# Altium PCB PCBanahtarlama.PcbDoc
Units mil, origin at the board's own origin, x right, y up, seen from the top; angles counter-clockwise.
Board outline 2550 x 1850 mil, 2 copper layers (Top Layer, Bottom Layer); 7 components, 4 nets, 19 pads, 0 vias.
Unrouted connection lines stored in the file: 3.
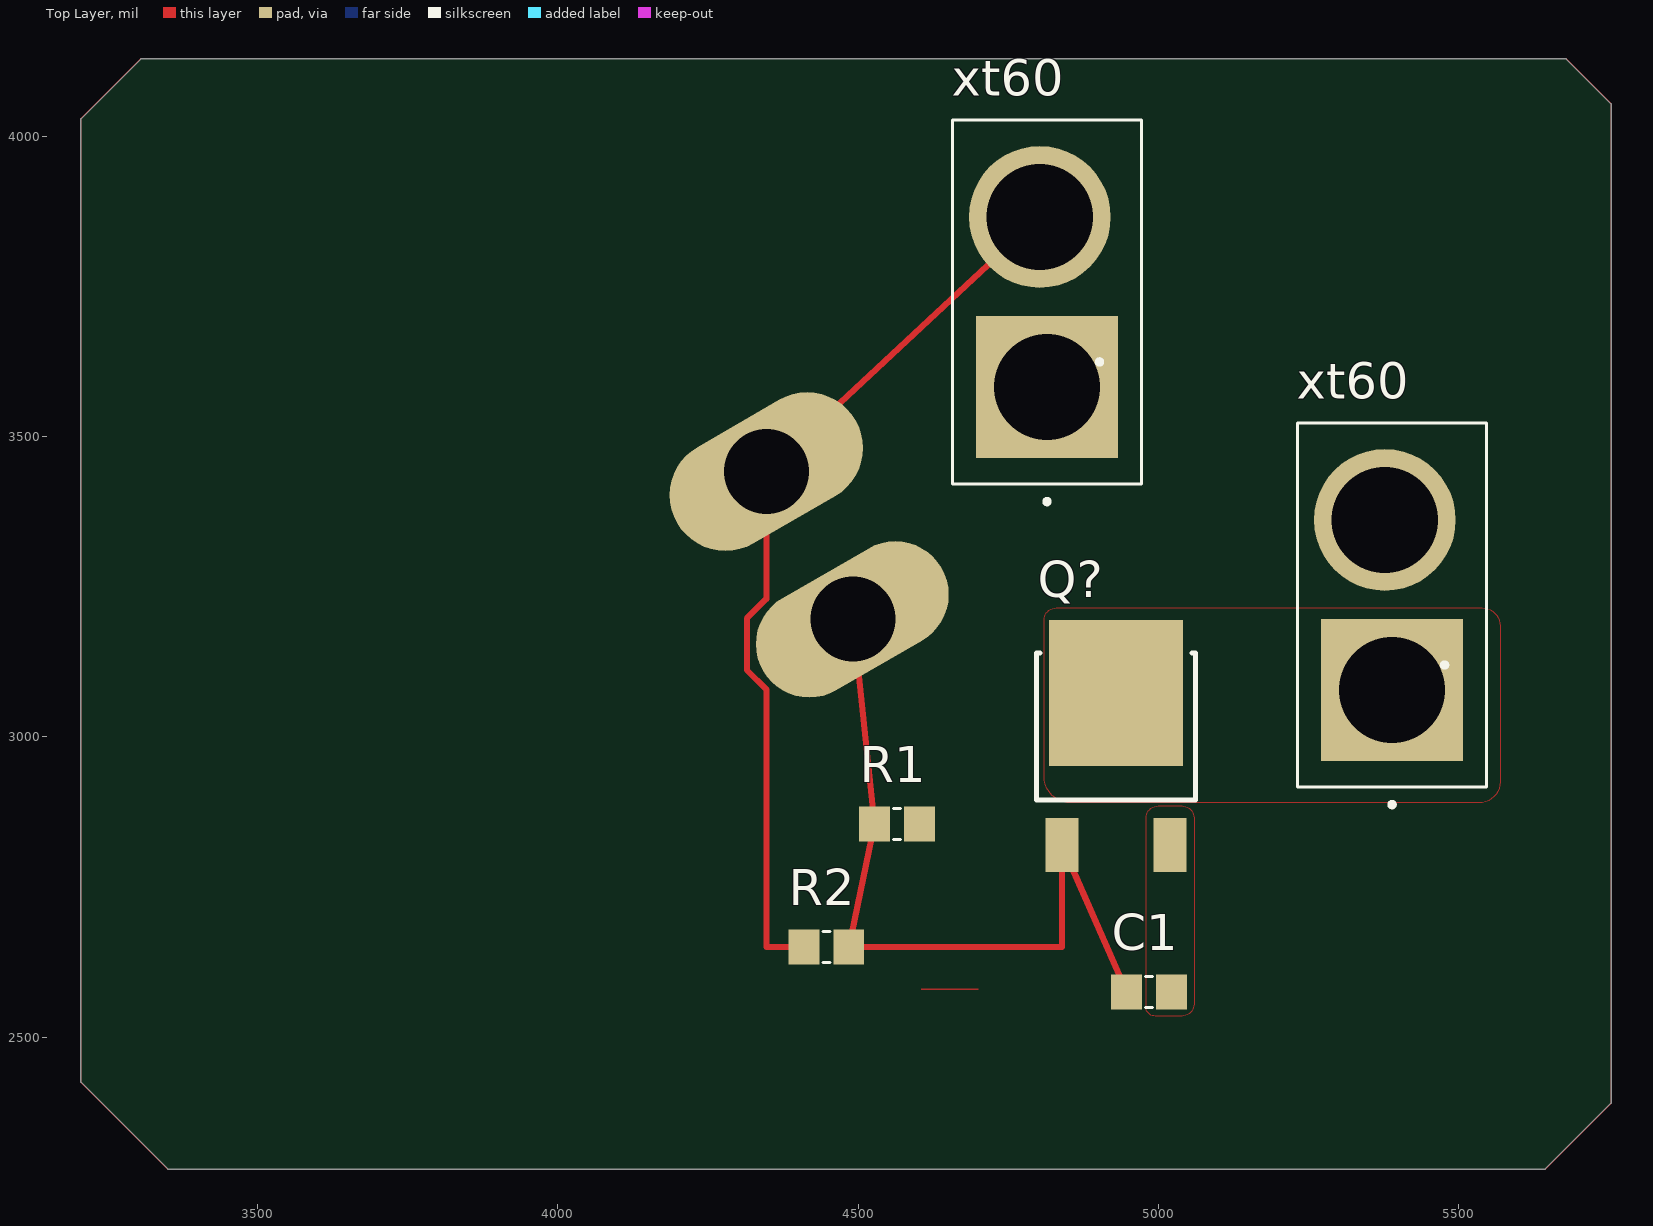
[diagram p0: Top Layer view]
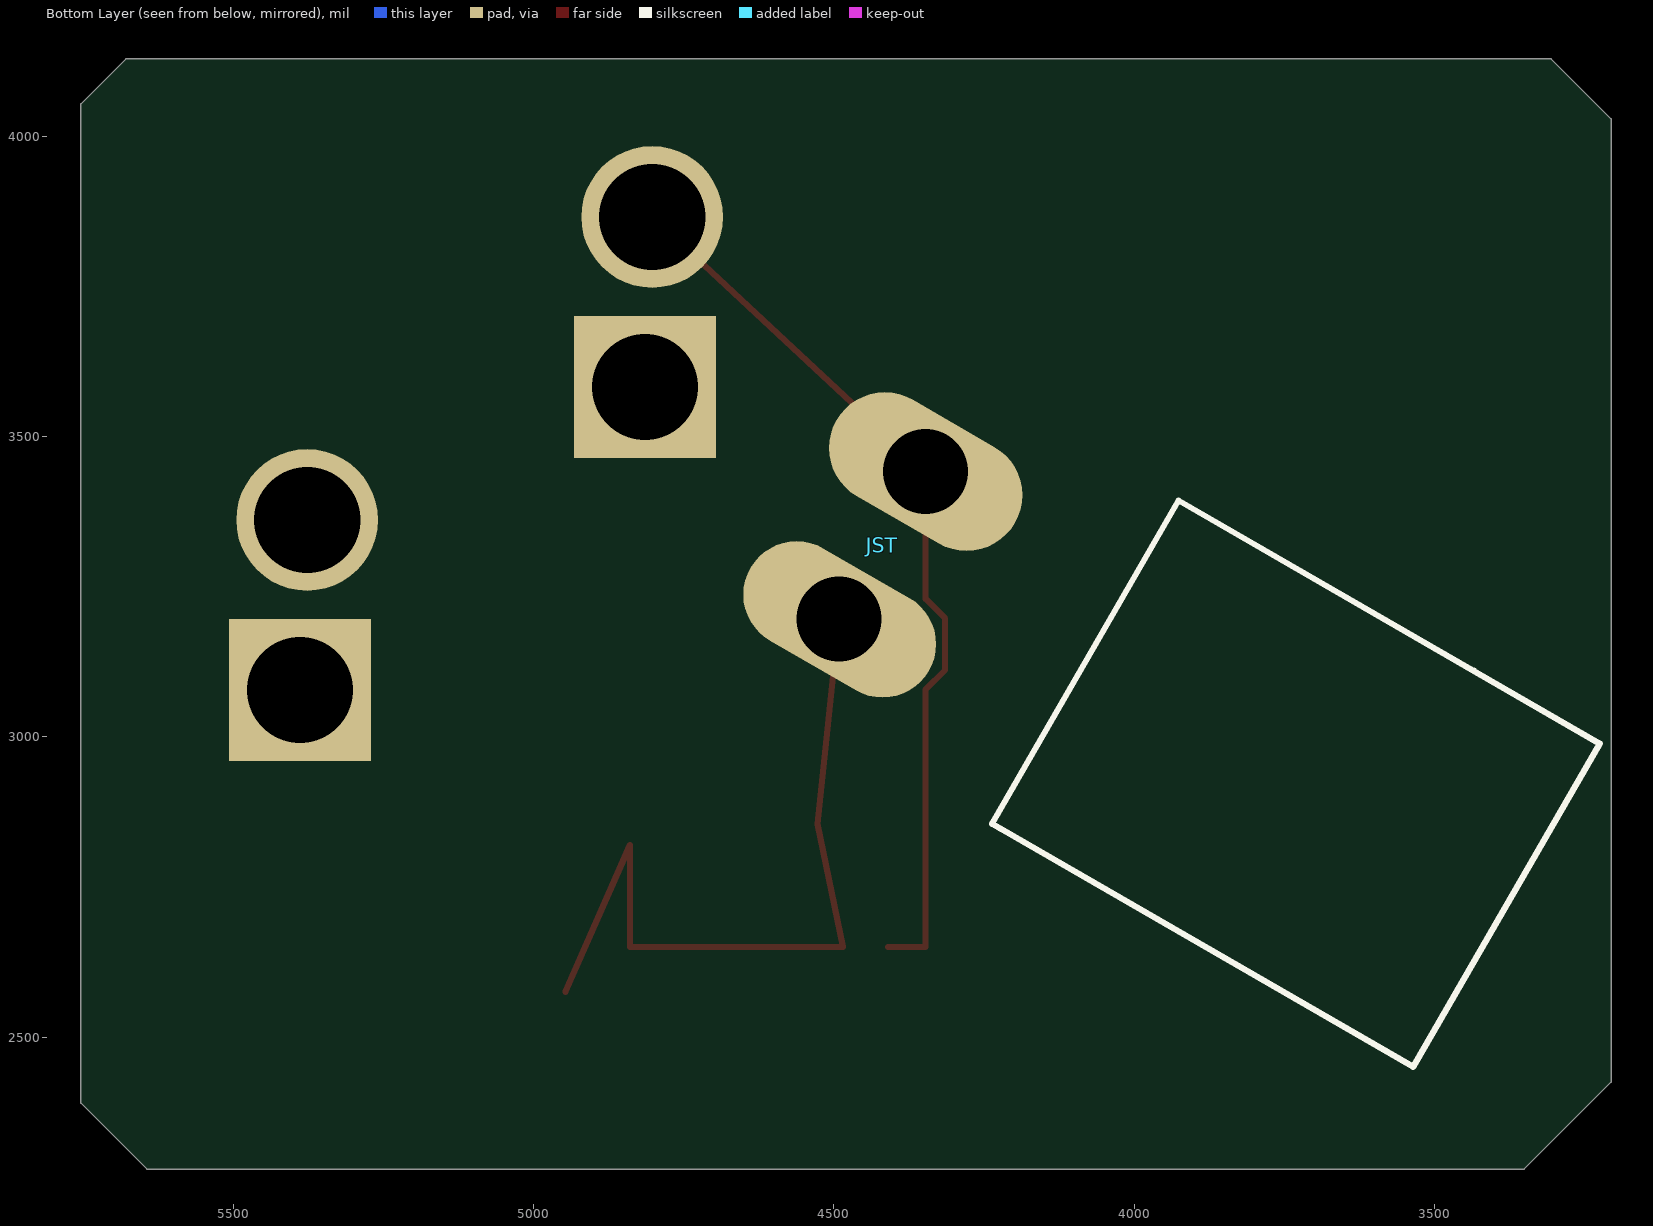
[diagram p1: Bottom Layer view, seen from below]

## Layer stack, top to bottom
Top Solder: solder mask 0.4, Solder Resist, Dk 3.5
Top Layer: signal copper 1.4
Dielectric 1: dielectric 12.6, FR-4, Dk 4.8
Bottom Layer: signal copper 1.4
Bottom Solder: solder mask 0.4, Solder Resist, Dk 3.5

## Board outline
3205,2425 3205,4030 3305,4130 5680,4130 5755,4055 5755,2390 5645,2280 3350,2280

## Design rules (kind name [scope] priority, off if disabled: settings)
Clearance [All] p1: gap=10 ignorepadtopadclearanceinfootprint=FALSE except(0: Arc-Hole Track-Hole SMDPad-Hole THPad-Hole Via-Hole Fill-Hole Poly-Hole Region-Hole Text-Hole)
PolygonConnect [All] p1: connectstyle=Relief reliefconductorwidth=10 reliefentries=4 polygonreliefangle="90 Angle" airgapwidth=10
RoutingVias [All] p1: holewidth=28 width=50 viastyle="Through Hole" minholewidth=28 minwidth=50 maxholewidth=28 maxwidth=50
SolderMaskExpansion [All] p1: expansion=4 istentingtop=FALSE
Width [All] p1: maxlimit=10 minlimit=10 preferedwidth=10
30 further rules are at their usual default settings.

## Classes and differential pairs
component class Anahtarlamasemasi: " " C1 Q? R1 R2 xt60

## Components (designator, comment, footprint, x,y, rotation, side; value= is the part's Value field where it differs from the comment)
C1 "470n" CAP0805 4985,2575 r0 top
JST "JST" XT60_H 4300,3250 r300 bottom
Q? "SUD50P04-08-GE3" Vishay_T16-0236_MFG 4930,2985 r0 top
R1 "10k" RES0805 4565,2855 r0 top
R2 "2.2M" RES0805 4447.4,2650 r0 top
xt60 "xt60" AMASS_XT60PB-M 4815,3725 r90 top
xt60 "xt60" AMASS_XT60PB-M 5390,3220 r90 top

## Footprints (in the part's own frame and the unit in brackets; to place one, negate y for a bottom-side part, rotate by r counter-clockwise, add the part's x,y. Pads: shape width x height; smd on the part's side, far side on the other; paste and mask are expansions set on the pad)
AMASS_XT60PB-M [mm]
  rect 6x6 hole 4.5: 1(-3.6,0)
  round 6 hole 4.5: 2(3.6,0.305)
  silkscreen extent -8.55,-4 7.7,4
CAP0805 [mm]
  rect 1.3x1.5 smd: 1(-0.95,0) 2(0.95,0)
  silkscreen extent -0.15,-0.65 0.15,0.65, body extent -1.1,-0.78 1.2,0.78, height 0.96
RES0805 [mm]
  rect 1.3x1.5 smd: 1(-0.95,0) 2(0.95,0)
  silkscreen extent -0.15,-0.65 0.15,0.65, body extent -1,-0.6 1,0.6, height 0.65
Vishay_T16-0236_MFG [mil]
  rect 55x90 smd paste+0 mask+0: 1(-90,-165) 3(90,-165)
  rect 224.02x243.31 smd paste+0 mask+0: 4(0,88.35)
  silkscreen extent -132,-90 132,155, body extent -136,-214 136,214, height 10
XT60_H [mil]
  oval 185.98x343.46 smd far side: 1(-143,-137)
  round 60 hole 141.73: 1(-143,-137) 2(142,-139)
  oval 185.98x343.46 smd: 1(-143,-137)
  oval 178.11x343.46 smd far side: 2(142,-138)
  oval 178.11x343.46 smd: 2(142,-138)
  silkscreen extent -313,252 310,1063, body extent -315,228 311,1063, height 338

## Part data
C1: library part Capacitor
JST: library part Connector
R1 R2: library part Resistor
xt60 xt60: library part XT-60

## Nets (pads, with @x,y where several pads share a name; then routed paths per layer and width w, separated by ;. In a path a pad name is that pad's centre, name@x,y a point inside that pad or via, vN(x,y) a via of type N, cw(c..) or ccw(c..) an arc to the next point about the centre after c; other vN are vias at no path point)
GND: JST.1 R2.1 xt60.2@4802.99,3866.73 | length 1504.8
  Top Layer w10: R2.1 4347.15,2650 4347.15,3079.29 4314.86,3111.58 4314.86,3197.79 4347.15,3230.08 4347.15,3442.34 xt60.2@4802.99,3866.73
NetC1_1: C1.1 JST.2 Q?.1 R1.1 R2.2 | length 1345.6
  Top Layer w10: JST.2@4491.38,3196.52 4491.42,3196.12 R1.1 R2.2 4840,2650 Q?.1 C1.1
NetQ?_4: Q?.4 xt60.1@5390,3078.27
VCC: C1.2 Q?.3 R1.2
pads on no net: xt60.1@4815,3583.27 xt60.2@5377.99,3361.73

## Polygon pours and split planes (outlines as drawn)
GND on Top Layer "GND_L01_P043" (solid, pour order 43): 3205,4030 3205,2425 3350,2280 5645,2280 5755,2390 5755,4055 5680,4130 3305,4130
VCC on Top Layer "VCC_L01_P040" (solid, pour order 40): 4995,2535 cw(c4995,2550) 4980,2550 4980,2865 cw(c5000,2865) 5000,2885 5040,2885 cw(c5040,2865) 5060,2865 5060,2555 cw(c5040,2555) 5040,2535
no net on Top Layer "NONET_L01_P038" (solid, pour order 38): 4970,2860
no net on Top Layer "NONET_L01_P035" (solid, pour order 35): 5150,2650
no net on Top Layer "NONET_L01_P030" (solid, pour order 30): 4990,2515
no net on Top Layer "NONET_L01_P028" (solid, pour order 28): 5010,2870
no net on Top Layer "NONET_L01_P027" (solid, pour order 27): 5010,2870
no net on Top Layer "NONET_L01_P025" (solid, pour order 25): 4995,2995
no net on Top Layer "NONET_L01_P024" (solid, pour order 24): 5480,2715
no net on Top Layer "NONET_L01_P023" (solid, pour order 23): 4810,3195 cw(c4830,3195) 4830,3215 5540,3215 cw(c5540,3185) 5570,3185 5570,2925 cw(c5535,2925) 5535,2890 4855,2890 cw(c4855,2935) 4810,2935
no net on Top Layer "NONET_L01_P022" (solid, pour order 22): 4815,3105
no net on Top Layer "NONET_L01_P021" (solid, pour order 21): 4850,3240
no net on Top Layer "NONET_L01_P020" (solid, pour order 20): 4850,2935
no net on Top Layer "NONET_L01_P019" (solid, pour order 19): 4835,2925
no net on Top Layer "NONET_L01_P018" (solid, pour order 18): 4810,2935
no net on Top Layer "NONET_L01_P017" (solid, pour order 17): 4800,3185
no net on Top Layer "NONET_L01_P016" (solid, pour order 16): 4810,3215
no net on Top Layer "NONET_L01_P011" (solid, pour order 11): 5190,2535
no net on Top Layer "NONET_L01_P009" (solid, pour order 9): 4980,2702.93
no net on Top Layer "NONET_L01_P007" (solid, pour order 7): 4975,2725
no net on Top Layer "NONET_L01_P006" (solid, pour order 6): 4475,2520
no net on Top Layer "NONET_L01_P005" (solid, pour order 5): 4700,2580
no net on Top Layer "NONET_L01_P004" (solid, pour order 4): 4605,2580 4700,2580
no net on Top Layer "NONET_L01_P003" (solid, pour order 3): 4660,2440
no net on Top Layer "NONET_L01_P002" (solid, pour order 2): 5260,2580
no net on Top Layer "NONET_L01_P000" (solid, pour order 0): 4990,2515